# Altium PCB my.PcbDoc (part 2 of 3)
Units mm, origin at the board's own origin, x right, y up, seen from the top; angles counter-clockwise.
Board outline 100 x 100 mm, 4 copper layers (Top Layer, Internal Plane 1, Internal Plane 2, Bottom Layer); 136 components, 166 nets, 575 pads, 210 vias.
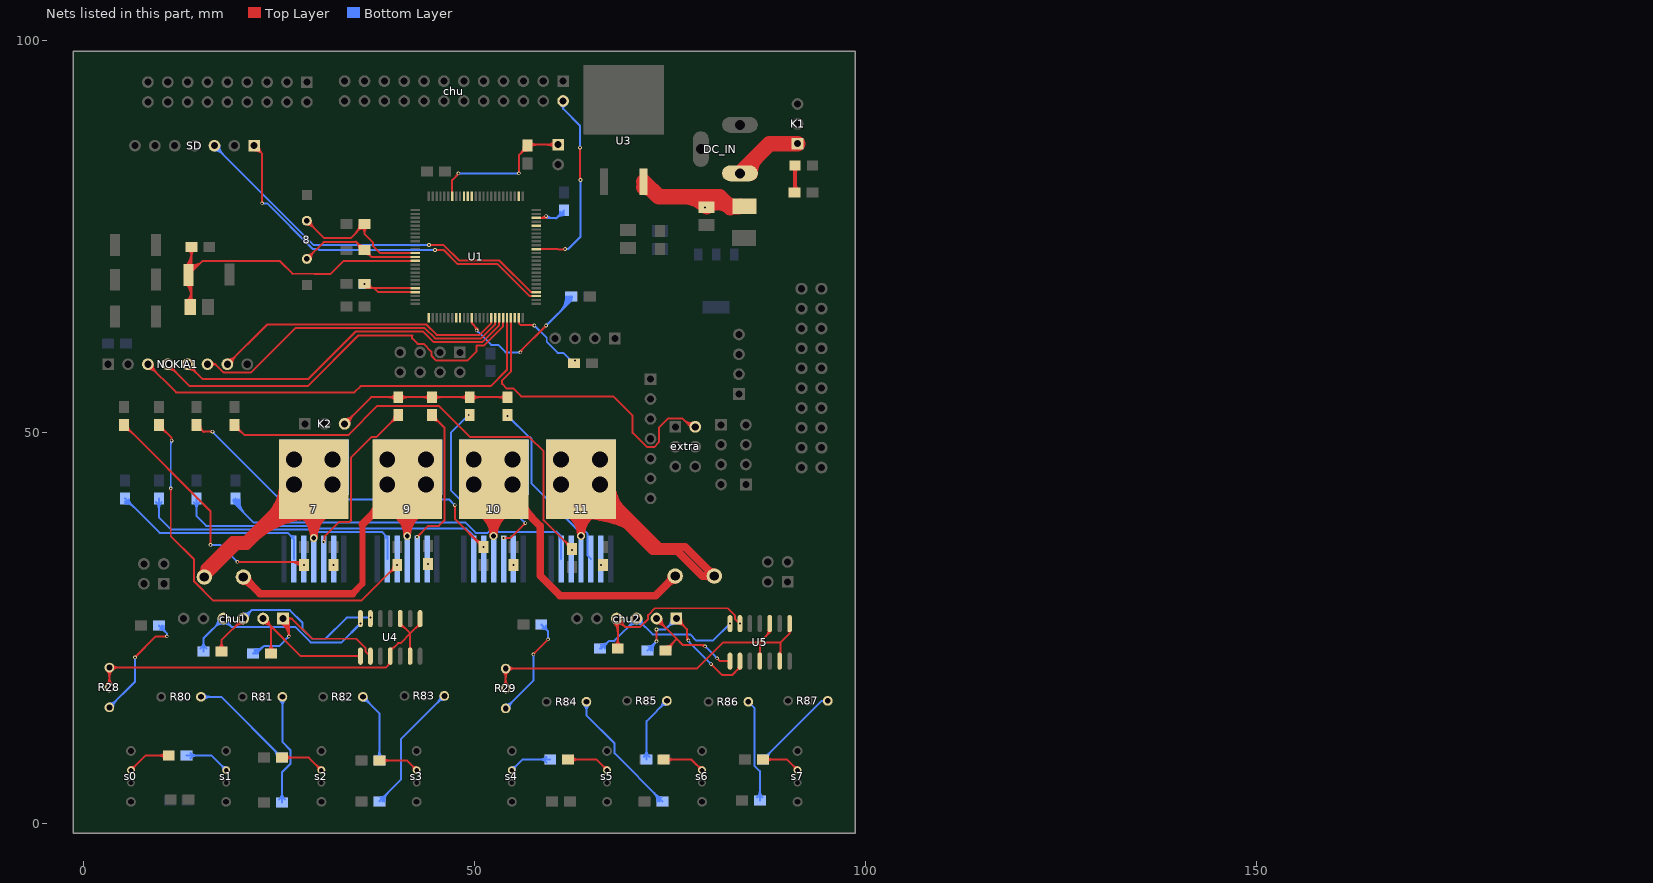
[diagram p4: the nets of this part, all layers, seen from the top]

## Via types
v1: diameter 0.457, hole 0.254, Top Layer to Bottom Layer, 170 vias
v2: diameter 3.5, hole 3, Top Layer to Bottom Layer, 12 vias
v3: diameter 0.8, hole 0.6, Top Layer to Bottom Layer, 7 vias
v4: diameter 1.27, hole 0.711, Top Layer to Bottom Layer, 6 vias
v5: diameter 1, hole 0.6, Top Layer to Bottom Layer, 5 vias
v6: diameter 2.5, hole 2.5, Top Layer to Bottom Layer, tented bottom, 4 vias
v7: diameter 0.7, hole 0.5, Top Layer to Bottom Layer, 2 vias
v8: diameter 0.8, hole 0.4, Top Layer to Bottom Layer, 2 vias
v9: diameter 0.7, hole 0.4, Top Layer to Bottom Layer, 1 vias
v10: diameter 1.2, hole 0.8, Top Layer to Bottom Layer, 1 vias

## Nets (pads, with @x,y where several pads share a name; then routed paths per layer and width w, separated by ;. In a path a pad name is that pad's centre, name@x,y a point inside that pad or via, vN(x,y) a via of type N, cw(c..) or ccw(c..) an arc to the next point about the centre after c; other vN are vias at no path point) (continued)
L0: c100.1 chu1.1 U4.2 | length 35.3
  Top Layer w0.254: chu1.1@25.213,25.624 cw(c24.123,23.752) v1@26.289,23.752 ; chu1.1@25.341,25.843 cw(c24.381,24.194) 26.289,24.194 ; chu1.1@25.469,26.063 cw(c24.638,24.636) 26.289,24.636 ; chu1.1@25.527,26.162 26.654,26.162 ; chu1.1@25.597,26.282 cw(c24.896,25.078) 26.289,25.078 ; chu1.1@25.725,26.502 cw(c25.153,25.52) 26.289,25.52 ; v1@26.217,23.948 ccw(c26.044,24.121) 26.289,24.121 ccw(c26.534,24.121) v1@26.361,23.948 ; v1(26.289,23.876) 26.289,25.4 ; U4.2@36.703,21.349 36.06,21.992 36.06,22.409 34.892,23.577 29.239,23.577 26.654,26.162 ; 26.654,26.162 cw(c26.654,26.869) 26.055,26.493 ccw(c26.654,26.869) 26.654,26.162 ; 26.654,26.162 ccw(c26.654,25.455) 26.055,25.831 cw(c26.654,25.455) 26.654,26.162
  Bottom Layer w0.254: c100.1@21.717,21.719 22.144,21.719 23.106,22.681 ; c100.1@21.863,21.972 ccw(c21.942,23.059) 22.713,22.288 ; c100.1@21.881,22.225 ccw(c21.996,23.79) 23.106,22.681 ; c100.1@22.352,21.719 cw(c22.855,21.719) 22.499,22.074 ; v1@26.187,23.876 cw(c25.942,23.876) 26.116,23.703 cw(c26.289,23.529) v1@26.289,23.774 ; v1(26.289,23.876) 25.094,22.681 23.106,22.681
L1: C101.1 chu1.2 U4.1 | length 28.4
  Top Layer w0.254: chu1.2@22.987,25.539 cw(c22.987,24.035) 24.051,25.098 cw(c25.114,26.162) chu1.2@23.61,26.162 ; chu1.2@22.987,25.793 cw(c22.987,24.902) 23.617,25.532 cw(c24.247,26.162) chu1.2@23.356,26.162 ; chu1.2@22.987,26.162 24.003,25.146 ; chu1.2@22.999,25.793 cw(c23.025,24.997) 23.589,25.56 cw(c24.152,26.124) chu1.2@23.356,26.15 ; chu1.2@23.007,25.539 cw(c23.052,24.195) 24.003,25.146 ; chu1.2@23.61,26.142 ccw(c24.954,26.097) 24.003,25.146 ; C101.1@23.644,22.078 ccw(c22.777,22.945) 24.003,22.945 ccw(c25.229,22.945) C101.1@24.362,22.078 ; C101.1@24.003,21.719 24.003,25.146 ; U4.1@35.433,21.349 27.8,21.349 24.003,25.146 ; 35.015,21.349 cw(c35.015,20.931) 35.311,21.227 ccw(c35.015,20.931) 35.015,21.349 ; 35.015,21.349 ccw(c35.015,21.767) 35.311,21.471 cw(c35.015,21.767) 35.015,21.349
L2: C102.1 chu1.3 U4.13 | length 38.5
  Top Layer w0.254: C102.1@17.294,22.332 ccw(c16.427,23.199) 17.653,23.199 ccw(c18.879,23.199) C102.1@18.012,22.332 ; C102.1@17.653,21.973 17.653,23.368 chu1.3@20.447,26.162 ; chu1.3@19.824,26.162 cw(c18.32,26.162) 19.383,25.098 cw(c20.447,24.035) chu1.3@20.447,25.539 ; chu1.3@20.078,26.162 cw(c19.187,26.162) 19.817,25.532 cw(c20.447,24.902) chu1.3@20.447,25.793
  Bottom Layer w0.254: chu1.3@20.447,26.162 21.524,27.239 26.412,27.239 28.022,25.629 28.022,24.794 29.239,23.577 30.959,23.577 33.671,26.289 36.449,26.289 ; v1@36.631,26.217 ccw(c36.458,26.044) 36.458,26.289 ccw(c36.458,26.534) v1@36.631,26.361 ; 21.077,26.792 cw(c20.447,27.422) 20.447,26.531 ccw(c20.447,27.422) 21.077,26.792 ; 21.077,26.792 ccw(c21.707,26.162) 20.816,26.162 cw(c21.707,26.162) 21.077,26.792 ; 21.511,27.226 cw(c20.447,28.289) 20.447,26.785 ccw(c20.447,28.289) 21.511,27.226 ; 21.511,27.226 ccw(c22.574,26.162) 21.07,26.162 cw(c22.574,26.162) 21.511,27.226
  other v1: 36.703,26.289
L3: C103.1 chu1.4 U4.14 | length 39
  Bottom Layer w0.254: C103.1@15.008,22.333 ccw(c14.141,23.201) 15.367,23.201 ccw(c16.593,23.201) C103.1@15.726,22.333 ; C103.1@15.367,21.974 15.367,23.622 chu1.4@17.907,26.162 18.984,25.085 27.089,25.085 29.051,23.123 33.029,23.123 v1(35.433,25.527) ; chu1.4@17.284,26.162 cw(c15.78,26.162) 16.843,25.098 cw(c17.907,24.035) chu1.4@17.907,25.539 ; chu1.4@17.538,26.162 cw(c16.647,26.162) 17.277,25.532 cw(c17.907,24.902) chu1.4@17.907,25.793 ; chu1.4@17.907,25.539 cw(c17.907,24.035) 18.971,25.098 ; chu1.4@17.907,25.539 cw(c17.907,24.035) 18.971,25.098 ; chu1.4@17.907,25.793 cw(c17.907,24.902) 18.537,25.532 ; chu1.4@17.907,25.793 cw(c17.907,24.902) 18.537,25.532 ; 18.537,25.532 cw(c19.167,26.162) 18.276,26.162 ccw(c19.167,26.162) 18.537,25.532 ; 18.971,25.098 cw(c20.034,26.162) 18.53,26.162 ccw(c20.034,26.162) 18.971,25.098 ; 35.26,25.354 cw(c35.433,25.18) 35.433,25.425 ccw(c35.433,25.18) 35.26,25.354 ; 35.26,25.354 ccw(c35.086,25.527) 35.331,25.527 cw(c35.086,25.527) 35.26,25.354
L4: C104.1 chu2.1 U5.2 | length 40
  Top Layer w0.254: v1@73.206,23.313 ccw(c73.028,23.49) 73.279,23.49 ; v1@73.207,24.693 cw(c73.034,24.52) 73.279,24.52 cw(c73.524,24.52) v1@73.351,24.693 ; v1(73.277,23.241) 73.279,23.243 v1(73.279,24.765) ; 73.279,23.482 ccw(c73.519,23.482) v1@73.349,23.313 ; chu2.1@75.819,26.162 77.171,24.81 77.171,23.54 v1(77.343,23.368) ; v1(80.264,20.32) 81.661,18.923 82.931,18.923 83.947,19.939 U5.2@83.947,20.714 ; chu2.1@76.449,25.532 cw(c77.079,26.162) 76.188,26.162 ccw(c77.079,26.162) chu2.1@76.449,25.532 ; chu2.1@76.449,25.532 ccw(c75.819,24.902) 75.819,25.793 cw(c75.819,24.902) chu2.1@76.449,25.532 ; 76.883,25.098 cw(c77.946,26.162) 76.442,26.162 ccw(c77.946,26.162) 76.883,25.098 ; 76.883,25.098 ccw(c75.819,24.035) 75.819,25.539 cw(c75.819,24.035) 76.883,25.098 ; 80.437,20.147 cw(c80.611,20.32) 80.366,20.32 ccw(c80.611,20.32) 80.437,20.147 ; 80.437,20.147 ccw(c80.264,19.973) 80.264,20.218 cw(c80.264,19.973) 80.437,20.147 ; 77.171,24.029 ccw(c78.004,24.029) 77.415,23.44 cw(c78.004,24.029) 77.171,24.029 ; 83.609,19.601 cw(c83.947,19.263) 83.947,19.741 ccw(c83.947,19.263) 83.609,19.601 ; 83.669,19.661 ccw(c83.417,19.914) 83.774,19.914 cw(c83.417,19.914) 83.669,19.661
  Bottom Layer w0.254: C104.1@72.136,22.1 v1(73.277,23.241) ; C104.1@72.263,22.608 ccw(c72.263,23.527) 72.913,22.877 ; C104.1@72.517,22.1 cw(c73.437,22.1) 72.786,22.75 ; C104.1@72.771,22.1 cw(c74.304,22.1) v1@73.22,23.184 ; v1@73.176,23.241 cw(c72.93,23.241) 73.104,23.068 cw(c73.277,22.894) v1@73.277,23.139 ; v1(73.279,24.765) 74.422,24.765 chu2.1@75.819,26.162 ; v1@73.351,24.693 cw(c73.524,24.52) 73.524,24.765 cw(c73.524,25.01) v1@73.351,24.837 ; chu2.1@75.196,26.162 cw(c73.692,26.162) 74.755,25.098 cw(c75.819,24.035) chu2.1@75.819,25.539 ; chu2.1@75.45,26.162 cw(c74.559,26.162) 75.189,25.532 cw(c75.819,24.902) chu2.1@75.819,25.793 ; v1(77.343,23.368) 77.343,23.241 v1(80.264,20.32) v1@80.264,20.447 ; 80.091,20.493 cw(c79.917,20.32) 80.162,20.32 ccw(c79.917,20.32) 80.091,20.493 ; 80.091,20.493 ccw(c80.264,20.667) 80.264,20.422 cw(c80.264,20.667) 80.091,20.493 ; v1@77.445,23.368 ccw(c77.996,23.368) 77.606,22.978 cw(c77.996,23.368) v1@77.445,23.368
L5: C105.1 chu2.2 U5.1 | length 28.1
  Top Layer w0.254: chu2.2@73.279,26.162 75.755,23.685 ; C105.1@74.422,22.101 75.755,23.435 75.755,23.685 ; C105.1@74.549,22.609 ccw(c74.549,23.529) 75.199,22.879 ; C105.1@74.803,22.101 cw(c75.723,22.101) 75.072,22.752 ; C105.1@75.057,22.101 cw(c76.59,22.101) 75.506,23.185 ; v1(79.502,22.608) 79.329,22.781 76.66,22.781 75.755,23.685 ; v1(81.026,21.082) 81.394,20.714 U5.1@82.677,20.714 ; 73.909,25.532 cw(c74.539,26.162) 73.648,26.162 ccw(c74.539,26.162) 73.909,25.532 ; 73.909,25.532 ccw(c73.279,24.902) 73.279,25.793 cw(c73.279,24.902) 73.909,25.532 ; 74.343,25.098 cw(c75.406,26.162) 73.902,26.162 ccw(c75.406,26.162) 74.343,25.098 ; 74.343,25.098 ccw(c73.279,24.035) 73.279,25.539 cw(c73.279,24.035) 74.343,25.098 ; 82.259,20.714 cw(c82.259,20.296) 82.555,20.592 ccw(c82.259,20.296) 82.259,20.714 ; 82.259,20.714 ccw(c82.259,21.132) 82.555,20.836 cw(c82.259,21.132) 82.259,20.714 ; 78.84,22.781 cw(c78.84,21.946) 79.43,22.536 ccw(c78.84,21.946) 78.84,22.781
  Bottom Layer w0.254: v1(79.502,22.608) v1(79.502,22.608) 79.502,22.606 v1(81.026,21.082) ; 80.853,21.255 cw(c80.679,21.082) 80.924,21.082 ccw(c80.679,21.082) 80.853,21.255 ; 80.853,21.255 ccw(c81.026,21.429) 81.026,21.184 cw(c81.026,21.429) 80.853,21.255 ; v1@79.502,22.506 cw(c79.502,22.266) 79.672,22.436 ccw(c79.502,22.266) v1@79.502,22.506 ; v1@79.604,22.608 ccw(c79.854,22.608) 79.677,22.431 cw(c79.854,22.608) v1@79.604,22.608
L6: C106.1 chu2.3 U5.14 | length 35
  Bottom Layer w0.254: C106.1@66.04,22.354 66.275,22.354 67.237,23.316 67.893,23.316 chu2.3@70.739,26.162 72.771,24.13 77.581,24.13 78.388,23.323 80.486,23.323 v1(82.677,25.514) ; C106.1@66.167,22.608 ccw(c66.167,23.482) C106.1@66.785,22.864 ; C106.1@66.167,22.862 ccw(c66.167,24.349) 67.219,23.297 ; C106.1@66.675,22.354 cw(c67.641,22.354) 66.958,23.036 ; chu2.3@70.116,26.162 cw(c68.612,26.162) 69.675,25.098 cw(c70.739,24.035) chu2.3@70.739,25.539 ; chu2.3@70.37,26.162 cw(c69.479,26.162) 70.109,25.532 cw(c70.739,24.902) chu2.3@70.739,25.793 ; chu2.3@70.739,25.539 cw(c70.739,24.035) 71.803,25.098 ; chu2.3@70.739,25.539 cw(c70.739,24.035) 71.803,25.098 ; chu2.3@70.739,25.793 cw(c70.739,24.902) 71.369,25.532 ; chu2.3@70.739,25.793 cw(c70.739,24.902) 71.369,25.532 ; 71.369,25.532 cw(c71.999,26.162) 71.108,26.162 ccw(c71.999,26.162) 71.369,25.532 ; 71.803,25.098 cw(c72.866,26.162) 71.362,26.162 ccw(c72.866,26.162) 71.803,25.098 ; 82.504,25.341 cw(c82.677,25.167) 82.677,25.412 ccw(c82.677,25.167) 82.504,25.341 ; 82.504,25.341 ccw(c82.33,25.514) 82.575,25.514 cw(c82.33,25.514) 82.504,25.341
L7: C107.1 chu2.4 U5.13 | length 35.8
  Top Layer w0.254: chu2.4@67.758,25.721 cw(c66.388,24.351) 68.326,24.351 ; chu2.4@67.938,25.901 cw(c67.002,24.965) 68.326,24.965 cw(c69.396,24.965) chu2.4@68.64,25.721 ; C107.1@67.967,22.714 ccw(c67.1,23.582) 68.326,23.582 ccw(c69.552,23.582) C107.1@68.685,22.714 ; chu2.4@68.199,26.162 chu2.4@68.326,26.035 ; C107.1@68.326,22.355 chu2.4@68.326,26.035 ; v1(83.947,25.514) 83.304,26.157 83.304,26.574 82.401,27.477 73.071,27.477 72.202,26.608 72.202,26.102 71.185,25.085 69.276,25.085 chu2.4@68.326,26.035 ; 68.829,25.532 cw(c69.459,26.162) 68.568,26.162 ccw(c69.459,26.162) 68.829,25.532 ; 68.829,25.532 ccw(c68.199,24.902) 68.199,25.793 cw(c68.199,24.902) 68.829,25.532 ; 69.263,25.098 cw(c70.326,26.162) 68.822,26.162 ccw(c70.326,26.162) 69.263,25.098 ; 69.263,25.098 ccw(c68.199,24.035) 68.199,25.539 cw(c68.199,24.035) 69.263,25.098 ; U5.13@83.774,25.687 cw(c83.6,25.514) 83.845,25.514 ccw(c83.6,25.514) U5.13@83.774,25.687 ; U5.13@83.774,25.687 ccw(c83.947,25.861) 83.947,25.616 cw(c83.947,25.861) U5.13@83.774,25.687
MISO0: SD.1 U1.53 | length 52.2
  Top Layer w0.254: SD.1@21.844,86.614 22.86,85.598 ; SD.1@21.856,86.245 cw(c21.882,85.449) 22.446,86.012 cw(c23.009,86.576) SD.1@22.213,86.602 ; SD.1@21.864,85.991 cw(c21.909,84.647) 22.86,85.598 ; SD.1@22.467,86.594 ccw(c23.811,86.549) 22.86,85.598 ; v1@22.788,79.32 ccw(c22.615,79.493) 22.86,79.493 ccw(c23.105,79.493) v1@22.932,79.32 ; v1(22.86,79.248) 22.86,85.598 ; v1(44.958,73.279) 46.07,73.279 47.867,71.482 52.959,71.482 57.051,67.39 U1.53@57.915,67.39 ; v1@45.03,73.207 cw(c45.203,73.034) 45.203,73.279 cw(c45.203,73.524) v1@45.03,73.351
  Bottom Layer w0.254: 23.114,79.248 23.488,79.248 29.33,73.406 30.026,73.406 30.153,73.279 v1(44.958,73.279) ; v1@44.886,73.207 ccw(c44.713,73.034) 44.713,73.279 ccw(c44.713,73.524) v1@44.886,73.351
MOSI0: SD.3 U1.54 | length 53.2
  Top Layer w0.254: v1@44.268,73.842 cw(c44.441,73.669) 44.441,73.914 cw(c44.441,74.159) v1@44.268,73.986 ; 44.45,73.914 46.077,73.914 48.055,71.936 53.157,71.936 57.18,67.913 57.892,67.913 U1.54@57.915,67.89
  Bottom Layer w0.254: SD.3@16.764,85.991 cw(c16.764,84.487) 17.828,85.55 cw(c18.891,86.614) SD.3@17.387,86.614 ; SD.3@16.764,86.245 cw(c16.764,85.354) 17.394,85.984 cw(c18.024,86.614) SD.3@17.133,86.614 ; SD.3@16.764,86.614 29.464,73.914 v1(44.196,73.914) ; v1@44.124,73.842 ccw(c43.951,73.669) 43.951,73.914 ccw(c43.951,74.159) v1@44.124,73.986
NCLK: NOKIA1.7 U1.42 | length 41.5
  Top Layer w0.254: NOKIA1.7@18.415,58.674 23.495,63.754 43.839,63.754 45.156,62.436 50.674,62.436 52.142,63.905 52.142,64.617 U1.42@52.165,64.64 ; NOKIA1.7@18.415,59.043 ccw(c18.415,59.934) 19.045,59.304 ccw(c19.675,58.674) NOKIA1.7@18.784,58.674 ; NOKIA1.7@18.415,59.297 ccw(c18.415,60.801) 19.479,59.738 ccw(c20.542,58.674) NOKIA1.7@19.038,58.674
NCS: NOKIA1.3 U1.46 | length 59
  Top Layer w0.254: NOKIA1.3@8.255,58.051 cw(c8.255,56.547) 9.319,57.61 cw(c10.382,58.674) NOKIA1.3@8.878,58.674 ; NOKIA1.3@8.255,58.305 cw(c8.255,57.414) 8.885,58.044 cw(c9.515,58.674) NOKIA1.3@8.624,58.674 ; NOKIA1.3@8.255,58.674 11.856,55.073 34.642,55.073 35.449,55.88 52.07,55.88 54.165,57.975 U1.46@54.165,64.64
NDC: NOKIA1.5 U1.44 | length 49.3
  Top Layer w0.254: NOKIA1.5@13.335,58.051 cw(c13.335,56.547) 14.399,57.61 cw(c15.462,58.674) NOKIA1.5@13.958,58.674 ; NOKIA1.5@13.335,58.305 cw(c13.335,57.414) 13.965,58.044 cw(c14.595,58.674) NOKIA1.5@13.704,58.674 ; NOKIA1.5@13.335,58.674 15.24,56.769 28.721,56.769 34.798,62.846 43.434,62.846 44.752,61.528 51.05,61.528 53.165,63.643 U1.44@53.165,64.64
NDN: NOKIA1.6 U1.43 | length 42.9
  Top Layer w0.254: NOKIA1.6@15.875,58.674 16.892,58.674 ; NOKIA1.6@16.43,58.391 cw(c16.892,58.156) 16.892,58.674 ; NOKIA1.6@16.43,58.957 ccw(c16.892,59.192) 16.892,58.674 ; U1.43@52.665,64.64 52.642,64.617 52.642,63.763 50.862,61.982 44.968,61.982 43.651,63.3 27.104,63.3 21.401,57.597 17.969,57.597 16.892,58.674
NET0: R28.2 R28.3 U4.4 U4.6 U4.8 U4.10 | length 69.2
  Top Layer w0.254: R28.2@3.327,17.348 R28.3@3.327,19.888 38.684,19.888 39.243,20.447 U4.4@39.243,21.349 39.243,22.02 40.253,23.03 40.556,23.03 41.783,24.257 ; U4.10@40.513,26.403 U4.10@40.513,26.149 40.513,25.527 41.783,24.257 ; U4.6@41.783,21.603 41.783,24.257 ; U4.8@43.053,26.403 U4.8@43.053,26.149 43.053,25.527 41.783,24.257 ; 3.327,18.55 cw(c2.125,18.55) 2.975,17.7 ccw(c2.125,18.55) 3.327,18.55 ; 3.327,18.55 ccw(c4.53,18.55) 3.68,17.7 cw(c4.53,18.55) 3.327,18.55 ; 3.327,18.686 cw(c4.53,18.686) R28.3@3.68,19.536 ; 3.327,18.686 ccw(c2.125,18.686) 2.975,19.536 cw(c2.125,18.686) 3.327,18.686 ; 3.327,18.686 cw(c4.53,18.686) R28.3@3.68,19.536 ; R28.3@3.68,19.536 cw(c4.53,18.686) 4.53,19.888 ; R28.3@3.68,19.536 cw(c4.53,18.686) 4.53,19.888 ; 4.53,19.888 cw(c4.53,21.09) 3.68,20.24 ccw(c4.53,21.09) 4.53,19.888 ; 41.783,22.567 cw(c41.365,22.567) 41.661,22.271 ccw(c41.365,22.567) 41.783,22.567 ; 41.783,22.567 ccw(c42.201,22.567) 41.905,22.271 cw(c42.201,22.567) 41.783,22.567 ; 38.876,20.08 ccw(c38.406,20.549) 39.07,20.549 cw(c38.406,20.549) 38.876,20.08 ; U4.4@39.243,22.322 ccw(c39.243,23.052) 39.759,22.536 cw(c39.243,23.052) U4.4@39.243,22.322 ; U4.10@40.513,25.176 cw(c40.513,24.329) 41.112,24.928 ccw(c40.513,24.329) U4.10@40.513,25.176 ; 42.454,24.928 cw(c43.053,24.329) 43.053,25.176 ccw(c43.053,24.329) 42.454,24.928
NET1: R29.2 R29.3 U5.4 U5.6 U5.8 U5.10 | length 68.8
  Top Layer w0.254: R29.2@54,17.221 R29.3@54,19.761 78.435,19.761 81.788,23.114 86.487,23.114 ; U5.4@86.487,20.714 86.487,23.114 ; U5.10@87.757,25.514 87.757,24.384 ; U5.6@89.027,20.714 89.154,20.841 89.154,23.114 ; U5.8@90.297,25.514 90.297,24.257 89.154,23.114 ; 54,18.423 cw(c52.798,18.423) 53.648,17.573 ccw(c52.798,18.423) 54,18.423 ; 54,18.423 ccw(c55.203,18.423) 54.353,17.573 cw(c55.203,18.423) 54,18.423 ; 54,18.559 cw(c55.203,18.559) R29.3@54.353,19.409 ; 54,18.559 ccw(c52.798,18.559) 53.648,19.409 cw(c52.798,18.559) 54,18.559 ; 54,18.559 cw(c55.203,18.559) R29.3@54.353,19.409 ; R29.3@54.353,19.409 cw(c55.203,18.559) 55.203,19.761 ; R29.3@54.353,19.409 cw(c55.203,18.559) 55.203,19.761 ; 55.203,19.761 cw(c55.203,20.963) 54.353,20.113 ccw(c55.203,20.963) 55.203,19.761 ; 86.487,21.932 cw(c86.069,21.932) 86.365,21.636 ccw(c86.069,21.932) 86.487,21.932 ; 86.487,21.932 ccw(c86.905,21.932) 86.609,21.636 cw(c86.905,21.932) 86.487,21.932 ; 86.487,23.114 89.154,23.114 ; 86.487,23.114 87.757,24.384 ; 87.757,24.384 cw(c87.985,24.384) 87.855,24.572 ccw(c87.985,24.384) 87.757,24.384 ; 87.757,24.384 ccw(c87.529,24.384) 87.659,24.572 cw(c87.529,24.384) 87.757,24.384 ; 90.297,24.296 cw(c90.715,24.296) 90.419,24.592 ccw(c90.715,24.296) 90.297,24.296 ; 90.297,24.296 ccw(c89.879,24.296) 90.175,24.592 cw(c89.879,24.296) 90.297,24.296 ; 87.228,23.855 ccw(c86.37,24.714) 87.584,24.714 cw(c86.37,24.714) 87.228,23.855 ; 87.662,24.289 ccw(c87.237,24.714) 87.838,24.714 cw(c87.237,24.714) 87.662,24.289 ; U5.6@88.905,21.636 ccw(c88.303,22.238) 89.154,22.238 cw(c88.303,22.238) U5.6@88.905,21.636
Net7_2: 7.2 R2.1
  other v1: 32.006,33.033
Net7_3: 7.3 R4.1 | length 24.6
  Top Layer w0.254: v1@30.662,36.026 ccw(c30.182,36.506) 30.861,36.506 ; v1(30.734,35.954) 30.734,36.068 30.747,36.081 30.861,36.081 30.861,36.703 32.693,38.535 34.044,38.535 34.236,38.727 34.236,46.763 36.822,49.349 37.441,49.349 R4.1@40.261,52.168 ; 39.177,51.084 cw(c40.261,50) R4.1@40.261,51.533 ; 39.483,51.391 ccw(c38.833,52.041) R4.1@39.753,52.041 ; 39.61,51.518 cw(c40.261,50.868) R4.1@40.261,51.787
Net7_5: 7.5 C10.2 R6.1 | length 40.8
  Top Layer w0.254: R6.1@5.209,50.292 cw(c5.209,48.759) 6.293,49.843 ; R6.1@5.209,50.546 cw(c5.209,49.626) 5.859,50.277 ; R6.1@5.209,50.927 16.256,39.88 v1(16.256,35.573) v1@16.256,35.56 ; R6.1@5.717,50.8 ccw(c6.636,50.8) 5.986,50.15 ; v1@16.184,35.645 ccw(c16.011,35.818) 16.256,35.818 ccw(c16.501,35.818) v1@16.328,35.645 ; v1(19.685,33.414) 27.798,33.414 C10.2@28.192,33.02 ; v1@19.757,33.342 cw(c19.93,33.169) 19.93,33.414 cw(c19.93,33.659) v1@19.757,33.486 ; 26.321,33.414 cw(c26.321,31.276) C10.2@27.833,32.788 ; 26.935,33.414 cw(c26.935,31.889) C10.2@28.013,32.967 ; 27.548,33.414 cw(c27.548,32.502) C10.2@28.192,33.147 ; C10.2@27.611,33.414 ccw(c27.611,33.729) C10.2@27.833,33.506
  Bottom Layer w0.254: v1(16.256,35.573) 17.513,35.573 v1@19.685,33.401 ; v1@16.328,35.501 cw(c16.501,35.328) 16.501,35.573 cw(c16.501,35.818) v1@16.328,35.645 ; 19.489,33.597 ccw(c19.685,33.792) v1@19.685,33.516
  other v1: 28.192,33.033
Net7_6: 7.6 R5.1 | length 29.8
  Bottom Layer w0.254: R5.1@5.336,40.894 cw(c5.336,39.361) 6.42,40.445 ; R5.1@5.336,41.148 cw(c5.336,40.228) 5.986,40.879 ; R5.1@5.336,41.529 9.756,37.109 26.139,37.109 26.924,36.324 7.6@26.924,33.782 ; R5.1@5.844,41.402 ccw(c6.763,41.402) 6.113,40.752 ; 26.36,36.889 ccw(c26.924,37.453) 7.6@26.924,36.655 ; 7.6@26.619,36.629 cw(c26.422,36.432) 7.6@26.701,36.432
Net9_2: 9.2 R7.1
  other v1: 44.069,33.147
Net9_3: 9.3 R8.1 | length 21.6
  Top Layer w0.254: v1(42.672,36.589) 44.056,37.973 45.466,37.973 45.466,38.019 46.174,38.727 46.174,50.573 R8.1@44.579,52.168 ; v1@42.672,36.691 ccw(c42.672,36.936) 42.845,36.762 ccw(c43.019,36.589) v1@42.774,36.589 ; R8.1@44.579,51.533 cw(c44.579,50) 45.663,51.084 ; R8.1@44.579,51.787 cw(c44.579,50.868) 45.229,51.518 ; R8.1@45.087,52.041 ccw(c46.006,52.041) 45.356,51.391
Net9_5: 9.5 C12.2 R10.1 | length 57.8
  Top Layer w0.254: R10.1@9.654,50.292 cw(c9.654,48.759) 10.738,49.843 ; R10.1@9.654,50.546 cw(c9.654,49.626) 10.304,50.277 ; R10.1@9.654,50.927 11.303,49.278 v1(11.303,48.908) ; R10.1@10.162,50.8 ccw(c11.081,50.8) 10.431,50.15 ; v1@11.104,42.74 cw(c10.931,42.567) 11.176,42.567 cw(c11.421,42.567) v1@11.248,42.74 ; v1@11.176,42.799 11.176,36.703 14.151,33.728 14.151,30.925 16.628,28.448 35.558,28.448 C12.2@40.13,33.02 ; 39.046,31.936 cw(c40.13,30.852) C12.2@40.13,32.385 ; 39.353,32.243 ccw(c38.703,32.893) C12.2@39.622,32.893 ; 39.48,32.37 cw(c40.13,31.719) C12.2@40.13,32.639 ; C12.2@39.956,32.845 cw(c40.132,32.669) C12.2@40.132,32.918 ; C12.2@39.96,32.849 ccw(c39.789,33.02) C12.2@40.03,33.02
  Bottom Layer w0.254: v1@11.104,42.884 ccw(c10.931,43.057) 11.176,43.057 ccw(c11.421,43.057) v1@11.248,42.884 ; v1(11.176,42.812) 11.176,48.768 v1@11.303,48.895 ; 11.176,48.356 cw(c11.855,48.356) v1@11.375,48.836
  other v1: 40.132,33.02
Net9_6: 9.6 R9.1 | length 38.1
  Bottom Layer w0.254: R9.1@9.294,41.043 cw(c8.427,40.176) 9.654,40.176 cw(c10.88,40.176) R9.1@10.013,41.043 ; R9.1@9.654,41.529 9.654,39.114 11.205,37.563 29.52,37.563 29.872,37.211 38.227,37.211 38.862,36.576 9.6@38.862,33.782 ; 38.379,37.059 cw(c37.753,36.432) 9.6@38.639,36.432
Net10_2: 10.2 R11.1
  other v1: 54.991,33.02
Net10_3: 10.3 R12.1 | length 26.7
  Top Layer w0.254: v1(53.721,36.462) 54.623,36.462 v1@56.515,38.354 ; v1@53.793,36.39 cw(c53.966,36.217) 53.966,36.462 cw(c53.966,36.707) v1@53.793,36.534 ; 56.332,38.171 ccw(c56.137,38.367) v1@56.413,38.367
  Bottom Layer w0.254: 49.093,52.014 ccw(c48.898,52.21) v1@49.174,52.21 ; v1@49.34,52.197 49.276,52.197 46.985,49.906 46.985,42.545 48.509,41.021 53.861,41.021 v1(56.515,38.367) ; v1@56.413,38.367 ccw(c56.168,38.367) 56.342,38.54 ccw(c56.515,38.714) v1@56.515,38.469
  other v1: 49.276,52.21
Net10_5: 10.5 C15.2 R14.1 | length 51
  Top Layer w0.254: R14.1@14.48,50.927 15.356,50.051 v1(16.51,50.051) ; R14.1@14.508,50.548 cw(c14.583,49.896) R14.1@15.047,50.36 ; R14.1@14.537,50.295 cw(c14.659,49.228) 15.419,49.988 ; R14.1@14.988,50.8 ccw(c15.907,50.8) 15.257,50.15 ; v1@16.438,49.979 ccw(c16.265,49.806) 16.265,50.051 ccw(c16.265,50.296) v1@16.438,50.123 ; v1@47.426,40.581 cw(c47.253,40.408) 47.498,40.408 cw(c47.743,40.408) v1@47.57,40.581 ; v1@47.498,40.64 47.498,38.908 51.1,35.306 v1(51.181,35.306) v1(51.181,35.306) ; 49.957,36.449 ccw(c51.183,37.675) C15.2@51.183,35.941 ; 50.39,36.015 ccw(c51.183,36.807) C15.2@51.183,35.687 ; 50.464,35.942 cw(c49.955,35.433) C15.2@50.675,35.433 ; C15.2@50.869,35.537 ccw(c51.181,35.85) C15.2@51.181,35.408
  Bottom Layer w0.254: v1@16.51,50.038 24.743,41.805 24.743,41.8 25.141,41.402 46.749,41.402 v1(47.498,40.653) ; v1@16.612,50.051 ccw(c16.888,50.051) 16.693,49.855 ; v1@47.396,40.653 ccw(c47.151,40.653) 47.325,40.826 ccw(c47.498,41) v1@47.498,40.755
Net10_6: 10.6 R13.1 | length 42.2
  Bottom Layer w0.254: R13.1@14.117,41.043 cw(c13.25,40.176) 14.476,40.176 cw(c15.703,40.176) R13.1@14.836,41.043 ; R13.1@14.476,41.529 14.476,39.245 15.704,38.017 29.747,38.017 30.099,37.665 48.968,37.665 10.6@49.911,36.722 ; 49.325,37.308 cw(c48.45,36.432) 10.6@49.688,36.432 ; 49.759,36.874 cw(c49.317,36.432) 10.6@49.942,36.432
Net11_2: 11.2 R15.1
  other v1: 66.167,33.02
Net11_3: 11.3 R16.1 | length 23.5
  Bottom Layer w0.254: v1@54.229,52.07 56.925,49.374 57.082,49.374 57.274,49.183 57.274,43.432 63.176,37.53 63.97,37.53 64.454,37.046 64.454,34.225 11.3@64.897,33.782 ; v1@54.331,52.083 ccw(c54.607,52.083) 54.412,51.887
  other v1: 54.229,52.083
Net11_5: 11.5 C20.2 R18.1 | length 63.7
  Top Layer w0.254: R18.1@19.306,50.292 cw(c19.306,48.759) 20.39,49.843 ; R18.1@19.306,50.546 cw(c19.306,49.626) 19.956,50.277 ; R18.1@19.306,50.927 20.576,49.657 33.909,49.657 37.592,53.34 45.458,53.34 49.449,49.349 57.031,49.349 58.855,47.525 58.855,38.727 62.486,35.096 C20.2@62.486,35.052 ; R18.1@19.814,50.8 ccw(c20.733,50.8) 20.083,50.15 ; 61.477,36.105 ccw(c62.486,37.114) C20.2@62.486,35.687 ; 61.677,35.904 cw(c60.952,35.179) C20.2@61.978,35.179 ; C20.2@61.91,35.671 ccw(c62.486,36.247) C20.2@62.486,35.433 ; C20.2@62.189,35.393 cw(c61.721,34.925) C20.2@62.382,34.925
  other v1: 62.484,34.925
Net11_6: 11.6 R17.1 | length 54.5
  Bottom Layer w0.254: R17.1@19.175,41.402 ccw(c20.091,41.402) 19.444,40.754 ; R17.1@19.429,41.402 ccw(c20.958,41.402) 19.877,40.321 ; R17.1@19.429,41.529 19.429,40.769 21.727,38.471 48.804,38.471 50.166,37.109 51.687,37.109 52.108,37.53 52.794,37.53 53.113,37.211 60.579,37.211 61.087,36.703 11.6@61.087,33.782 ; R17.1@19.683,41.402 ccw(c21.826,41.402) 20.311,39.887 ; R17.1@19.937,41.402 ccw(c22.693,41.402) 20.744,39.454 ; 60.515,37.275 cw(c59.671,36.432) 11.6@60.864,36.432 ; 60.948,36.842 cw(c60.539,36.432) 11.6@61.118,36.432
NetC3_2: C3.2 U1.49 | length 11
  Top Layer w0.254: U1.49@55.665,64.64 55.688,64.617 55.688,63.905 55.88,63.713 57.572,63.713 v1(57.658,63.627) ; 57.205,63.713 cw(c57.205,63.174) v1@57.586,63.555
  Bottom Layer w0.254: v1@57.658,63.525 cw(c57.658,63.28) 57.831,63.454 cw(c58.005,63.627) v1@57.76,63.627 ; v1(57.658,63.627) 59.248,62.037 59.248,61.53 60.643,60.135 61.381,60.135 62.334,59.182 v1(62.865,59.182)
NetC5_2: C5.2 U1.73 | length 8.5
  Top Layer w0.254: U1.73@57.915,77.39 v1@59.102,77.39 ; U1.73@58.437,77.39 ccw(c58.437,78.342) v1@59.11,77.669 ; 59.05,77.39 ccw(c59.05,77.729) v1@59.29,77.489
  Bottom Layer w0.254: v1@59.074,77.489 ccw(c59.314,77.729) 59.314,77.39 ; v1@59.102,77.39 60.501,77.39 C5.2@61.47,78.359 ; v1@59.254,77.669 ccw(c59.927,78.342) 59.927,77.39 ; 60.437,77.327 cw(c61.4,76.364) C5.2@61.451,77.724 ; 60.692,77.582 ccw(c60.042,78.232) C5.2@60.962,78.232 ; C5.2@60.849,77.738 cw(c61.429,77.158) C5.2@61.46,77.978
  other v1: 59.182,77.597
NetC16_1: C16.1 C17.2 SAFE.2 U3.3 | length 30.8
  Top Layer w1: C16.1@79.5,78.469 ccw(c79.5,79.044) C16.1@79.907,78.637 ; C16.1@79.692,78.74 80.01,78.74 81.351,80.081 ; 82.564,78.867 SAFE.2@84.519,78.867 ; SAFE.2@83.646,78.502 ccw(c82.765,77.621) 82.765,78.867 ccw(c82.765,80.113) SAFE.2@83.646,79.232
  Top Layer w2: U3.3@71.628,81.324 cw(c71.628,79.634) 72.823,80.829 ; U3.3@71.628,82.024 73.571,80.081 81.351,80.081 ; 76.777,80.081 cw(c76.777,76.078) C16.1@79.607,78.908 ; C16.1@79.715,78.796 cw(c81.351,78.397) 81.351,80.081 ; C16.1@79.806,78.932 cw(c81.134,77.119) 82.723,78.708 ; 82.074,79.357 ccw(c83.432,80.716) SAFE.2@84.006,78.882 ; 82.564,78.867 81.351,80.081
  other v1: 79.5,78.74
NetC22_1: C22.1 L1.1 U1.21 U1.22 | length 15.8
  Top Layer w0.254: C22.1@35.814,68.948 ccw(c36.405,68.982) C22.1@36.405,68.39 ; v1(35.941,68.963) 36.514,68.39 37.211,68.39 ; C22.1@36.068,68.963 ccw(c36.674,68.997) C22.1@36.674,68.39 ; C22.1@36.322,68.977 ccw(c36.942,69.012) 36.942,68.39 ; C22.1@36.575,68.991 ccw(c37.211,69.027) 37.211,68.39 ; U1.22@42.415,67.89 37.711,67.89 37.211,68.39 ; U1.21@42.415,68.39 37.211,68.39
NetDC_IN_1: DC_IN.1 K1.1 | length 16.2
  Top Layer w1: DC_IN.1@84.733,83.081 cw(c86.631,83.081) 85.289,84.423 ; DC_IN.1@85.733,83.081 cw(c90.045,83.081) 86.996,86.13
  Top Layer w2: DC_IN.1@83.947,83.081 87.734,86.868 K1.1@91.313,86.868 ; DC_IN.1@85.233,83.081 cw(c88.338,83.081) 86.142,85.276
NetDS2_2: DS2.2 R19.1 | length 6.4
  Top Layer w0.5: DS2.2@90.735,83.803 cw(c90.078,83.146) 91.007,83.146 cw(c91.937,83.146) DS2.2@91.279,83.803 ; R19.1@90.787,80.916 ccw(c90.255,81.448) 91.007,81.448 ; R19.1@90.932,80.643 91.007,80.719 DS2.2@91.007,84.076 ; 91.007,81.698 ccw(c92.114,81.698) R19.1@91.331,80.916
NetK2_3: K2.3 R4.2 R8.2 R12.2 R16.2 | length 39.5
  Top Layer w0.254: K2.3@33.401,51.054 36.801,54.454 R4.2@40.261,54.454 R8.2@44.579,54.454 R12.2@49.405,54.454 R16.2@54.231,54.454 ; K2.3@33.401,51.423 ccw(c33.401,52.314) 34.031,51.684 ccw(c34.661,51.054) K2.3@33.77,51.054 ; K2.3@33.401,51.677 ccw(c33.401,53.181) 34.465,52.118 ccw(c35.528,51.054) K2.3@34.024,51.054 ; R4.2@39.901,54.095 ccw(c39.034,53.228) 39.034,54.454 ccw(c39.034,55.681) R4.2@39.901,54.814 ; R4.2@40.62,54.095 cw(c41.487,53.228) 41.487,54.454 cw(c41.487,55.681) R4.2@40.62,54.814 ; R8.2@44.219,54.095 ccw(c43.352,53.228) 43.352,54.454 ccw(c43.352,55.681) R8.2@44.219,54.814 ; R8.2@44.938,54.095 cw(c45.805,53.228) 45.805,54.454 cw(c45.805,55.681) R8.2@44.938,54.814 ; R12.2@49.045,54.095 ccw(c48.178,53.228) 48.178,54.454 ccw(c48.178,55.681) R12.2@49.045,54.814 ; R12.2@49.764,54.095 cw(c50.631,53.228) 50.631,54.454 cw(c50.631,55.681) R12.2@49.764,54.814 ; R16.2@53.871,54.095 ccw(c53.004,53.228) 53.004,54.454 ccw(c53.004,55.681) R16.2@53.871,54.814
NetP1_1: P1.1 R1.2 U1.94 | length 28.2
  Top Layer w0.254: U1.94@47.165,80.14 47.165,82.217 v1@48.006,83.058 ; 47.715,82.767 ccw(c47.411,83.071) v1@47.841,83.071 ; v1@55.618,83.143 ccw(c55.444,83.316) 55.689,83.316 ccw(c55.935,83.316) v1@55.761,83.143 ; v1(55.689,83.071) 55.689,85.407 56.771,86.489 R1.2@56.771,86.614 56.898,86.741 P1.1@60.706,86.741 ; 55.901,85.619 cw(c56.771,84.749) R1.2@56.771,85.979 ; 55.905,85.623 ccw(c55.04,86.487) R1.2@56.263,86.487 ; R1.2@57.13,86.382 cw(c57.997,85.515) 57.997,86.741 cw(c57.997,87.967) R1.2@57.13,87.1 ; P1.1@60.265,86.3 ccw(c59.202,85.237) 59.202,86.741 ccw(c59.202,88.245) P1.1@60.265,87.182 ; P1.1@60.445,86.48 ccw(c59.815,85.85) 59.815,86.741 ccw(c59.815,87.632) P1.1@60.445,87.002
  Bottom Layer w0.254: v1(47.942,83.071) v1(55.689,83.071) v1@55.74,83.071 ; v1@48.014,82.999 cw(c48.188,82.826) 48.188,83.071 cw(c48.188,83.316) v1@48.014,83.143 ; v1@55.618,82.999 ccw(c55.444,82.826) 55.444,83.071 ccw(c55.444,83.316) v1@55.618,83.143
NetR21_2: R21.2 U1.37 | length 27.3
  Top Layer w0.254: U1.37@49.665,64.64 49.688,64.617 49.688,63.905 50.292,63.301 v1(50.292,62.992) ; 49.9,63.692 cw(c49.2,62.992) v1@50.19,62.992 ; 50.334,63.259 cw(c50.067,62.992) v1@50.444,62.992 ; v1(55.88,60.198) 55.88,60.325 v1(59.182,63.627) ; v1@55.982,60.198 cw(c56.533,60.198) 56.143,60.588 ; v1@59.08,63.627 cw(c58.835,63.627) 59.009,63.454 cw(c59.182,63.28) v1@59.182,63.525
  Bottom Layer w0.254: v1@50.292,62.89 cw(c50.292,62.645) 50.465,62.819 cw(c50.639,62.992) v1@50.394,62.992 ; v1(50.292,62.992) 52.124,61.16 53.03,61.16 53.992,60.198 v1(55.88,60.198) ; v1@55.808,60.126 ccw(c55.635,59.953) 55.635,60.198 ccw(c55.635,60.443) v1@55.808,60.27 ; v1(59.182,63.627) 62.357,66.802 R21.2@62.357,67.308 ; v1@59.182,63.729 ccw(c59.182,63.974) 59.355,63.8 ccw(c59.529,63.627) v1@59.284,63.627 ; 60.915,65.36 ccw(c58.966,67.308) R21.2@61.722,67.308 ; 61.349,65.794 ccw(c59.834,67.308) R21.2@61.976,67.308 ; 61.782,66.227 ccw(c60.701,67.308) R21.2@62.23,67.308 ; 62.216,66.661 ccw(c61.568,67.308) R21.2@62.484,67.308
NetR28_1: R28.1 R40.2 | length 20.1
  Top Layer w0.254: v1(6.604,21.209) 9.271,23.876 v1(10.668,23.876) ; v1@6.604,21.311 ccw(c6.604,21.556) 6.777,21.382 ccw(c6.951,21.209) v1@6.706,21.209 ; v1@10.596,23.804 ccw(c10.423,23.631) 10.423,23.876 ccw(c10.423,24.121) v1@10.596,23.948
  Bottom Layer w0.254: R28.1@3.327,14.808 6.604,18.085 v1(6.604,21.209) ; R28.1@3.327,15.306 ccw(c3.327,16.508) 4.178,15.658 ccw(c5.028,14.808) R28.1@3.825,14.808 ; v1@6.532,21.137 cw(c6.359,20.964) 6.604,20.964 cw(c6.849,20.964) v1@6.676,21.137 ; R40.2@9.652,25.275 10.668,24.259 v1(10.668,23.876) ; R40.2@9.779,24.767 cw(c9.779,23.847) 10.429,24.497 ; R40.2@10.032,25.249 ccw(c10.706,25.179) R40.2@10.227,24.7 ; R40.2@10.284,25.223 ccw(c11.391,25.109) 10.604,24.322
NetR29_1: R29.1 R41.2 | length 17.1
  Top Layer w0.254: v1(57.531,21.59) v1(59.436,23.495) ; v1@57.531,21.692 ccw(c57.531,21.937) 57.704,21.763 ccw(c57.878,21.59) v1@57.633,21.59 ; v1@59.334,23.495 cw(c59.089,23.495) 59.263,23.322 cw(c59.436,23.148) v1@59.436,23.393
  Bottom Layer w0.254: R29.1@54,15.179 ccw(c54,16.381) 54.851,15.531 ; R29.1@54.498,14.681 cw(c55.701,14.681) 54.851,15.531 ; v1@57.459,21.518 cw(c57.286,21.345) 57.531,21.345 cw(c57.776,21.345) v1@57.603,21.518 ; v1(57.531,21.59) 57.531,18.212 54.851,15.531 ; R41.2@58.547,25.402 59.436,24.513 v1(59.436,23.495) ; R41.2@58.674,24.894 cw(c58.674,23.974) 59.324,24.624 ; R41.2@59.169,25.287 ccw(c59.911,25.115) 59.372,24.576 ; v1@59.364,23.567 ccw(c59.191,23.74) 59.436,23.74 ccw(c59.681,23.74) v1@59.508,23.567
Netr60_2: r60.2 s0.2 | length 12.3
  Top Layer w0.254: s0.2@6.088,6.781 7.944,8.638 r60.2@10.922,8.638 ; 6.724,7.418 cw(c6.088,8.054) 6.088,7.154 ccw(c6.088,8.054) 6.724,7.418 ; 6.724,7.418 ccw(c7.361,6.781) 6.461,6.781 cw(c7.361,6.781) 6.724,7.418 ; 9.569,8.638 cw(c9.569,7.411) 10.436,8.278 ccw(c9.569,7.411) 9.569,8.638 ; 9.569,8.638 ccw(c9.569,9.864) 10.436,8.997 cw(c9.569,9.864) 9.569,8.638
Netr61_2: r61.2 s1.2 | length 12.5
  Bottom Layer w0.254: r61.2@13.208,8.638 16.406,8.638 s1.2@18.263,6.781 ; 14.561,8.638 cw(c14.561,9.864) 13.694,8.997 ccw(c14.561,9.864) 14.561,8.638 ; 14.561,8.638 ccw(c14.561,7.411) 13.694,8.278 cw(c14.561,7.411) 14.561,8.638 ; 17.626,7.418 cw(c16.989,6.781) 17.89,6.781 ccw(c16.989,6.781) 17.626,7.418 ; 17.626,7.418 ccw(c18.263,8.054) 18.263,7.154 cw(c18.263,8.054) 17.626,7.418
Netr62_2: r62.2 s2.2 | length 12.4
  Top Layer w0.254: r62.2@25.4,8.38 28.838,8.38 s2.2@30.438,6.781 ; 26.753,8.38 cw(c26.753,9.607) 25.886,8.74 ccw(c26.753,9.607) 26.753,8.38 ; 26.753,8.38 ccw(c26.753,7.154) 25.886,8.021 cw(c26.753,7.154) 26.753,8.38 ; 29.801,7.418 cw(c29.164,6.781) 30.065,6.781 ccw(c29.164,6.781) 29.801,7.418 ; 29.801,7.418 ccw(c30.438,8.054) 30.438,7.154 cw(c30.438,8.054) 29.801,7.418
Netr63_2: r63.2 s3.2 | length 12
  Top Layer w0.254: r63.2@37.846,7.999 41.394,7.999 s3.2@42.612,6.781 ; 39.199,7.999 cw(c39.199,9.226) 38.332,8.359 ccw(c39.199,9.226) 39.199,7.999 ; 39.199,7.999 ccw(c39.199,6.773) 38.332,7.64 cw(c39.199,6.773) 39.199,7.999 ; 41.976,7.418 cw(c41.339,6.781) 42.239,6.781 ccw(c41.339,6.781) 41.976,7.418 ; 41.976,7.418 ccw(c42.612,8.054) 42.612,7.154 cw(c42.612,8.054) 41.976,7.418
Netr64_2: r64.2 s4.2 | length 12.1
  Bottom Layer w0.254: s4.2@54.788,6.781 56.133,8.126 r64.2@59.69,8.126 ; 55.424,7.418 cw(c54.788,8.054) 54.788,7.154 ccw(c54.788,8.054) 55.424,7.418 ; 55.424,7.418 ccw(c56.061,6.781) 55.16,6.781 cw(c56.061,6.781) 55.424,7.418 ; 58.337,8.126 cw(c58.337,6.9) 59.204,7.767 ccw(c58.337,6.9) 58.337,8.126 ; 58.337,8.126 ccw(c58.337,9.353) 59.204,8.486 cw(c58.337,9.353) 58.337,8.126
Netr65_2: r65.2 s5.2 | length 12.2
  Top Layer w0.254: r65.2@61.976,8.126 65.617,8.126 s5.2@66.963,6.781 ; 63.329,8.126 cw(c63.329,9.353) 62.462,8.486 ccw(c63.329,9.353) 63.329,8.126 ; 63.329,8.126 ccw(c63.329,6.9) 62.462,7.767 cw(c63.329,6.9) 63.329,8.126 ; 66.326,7.418 cw(c65.689,6.781) 66.59,6.781 ccw(c65.689,6.781) 66.326,7.418 ; 66.326,7.418 ccw(c66.963,8.054) 66.963,7.154 cw(c66.963,8.054) 66.326,7.418
Netr66_2: r66.2 s6.2 | length 12.2
  Top Layer w0.254: r66.2@74.168,8.126 77.755,8.126 s6.2@79.1,6.781 ; 75.521,8.126 cw(c75.521,9.353) 74.654,8.486 ccw(c75.521,9.353) 75.521,8.126 ; 75.521,8.126 ccw(c75.521,6.9) 74.654,7.767 cw(c75.521,6.9) 75.521,8.126 ; 78.463,7.418 cw(c77.827,6.781) 78.727,6.781 ccw(c77.827,6.781) 78.463,7.418 ; 78.463,7.418 ccw(c79.1,8.054) 79.1,7.154 cw(c79.1,8.054) 78.463,7.418
Netr67_2: r67.2 s7.2 | length 11.7
  Top Layer w0.254: r67.2@86.868,8.126 89.967,8.126 s7.2@91.312,6.781 ; 88.221,8.126 cw(c88.221,9.353) 87.354,8.486 ccw(c88.221,9.353) 88.221,8.126 ; 88.221,8.126 ccw(c88.221,6.9) 87.354,7.767 cw(c88.221,6.9) 88.221,8.126 ; 90.676,7.418 cw(c90.039,6.781) 90.94,6.781 ccw(c90.039,6.781) 90.676,7.418 ; 90.676,7.418 ccw(c91.312,8.054) 91.312,7.154 cw(c91.312,8.054) 90.676,7.418
NetR70_2: R70.2 R80.1 | length 22.7
  Bottom Layer w0.254: R80.1@15.037,16.154 17.629,16.154 R70.2@25.4,8.384 ; 16.239,16.154 cw(c16.239,17.357) 15.389,16.507 ccw(c16.239,17.357) 16.239,16.154 ; 16.239,16.154 ccw(c16.239,14.952) 15.389,15.802 cw(c16.239,14.952) 16.239,16.154 ; 24.316,9.468 cw(c23.232,8.384) 24.765,8.384 ccw(c23.232,8.384) 24.316,9.468 ; 24.623,9.161 ccw(c25.273,9.811) 25.273,8.892 cw(c25.273,9.811) 24.623,9.161 ; 24.75,9.034 cw(c24.099,8.384) 25.019,8.384 ccw(c24.099,8.384) 24.75,9.034
NetR71_2: R71.2 R81.1 | length 22
  Bottom Layer w0.254: R71.2@25.4,2.669 25.4,6.524 26.489,7.613 26.489,9.346 25.451,10.384 R81.1@25.451,16.154 ; 25.4,3.895 cw(c24.174,3.895) 25.041,3.028 ccw(c24.174,3.895) 25.4,3.895 ; 25.4,3.895 ccw(c26.626,3.895) 25.759,3.028 cw(c26.626,3.895) 25.4,3.895 ; 25.451,14.952 cw(c26.653,14.952) 25.803,15.802 ccw(c26.653,14.952) 25.451,14.952 ; 25.451,14.952 ccw(c24.249,14.952) 25.099,15.802 cw(c24.249,14.952) 25.451,14.952
NetR72_2: R72.2 R82.1 | length 16.7
  Bottom Layer w0.254: R82.1@35.738,16.154 37.846,14.046 R72.2@37.846,8.003 ; 36.588,15.304 cw(c37.438,16.154) 36.236,16.154 ccw(c37.438,16.154) 36.588,15.304 ; 36.588,15.304 ccw(c35.738,14.454) 35.738,15.656 cw(c35.738,14.454) 36.588,15.304 ; 37.846,9.229 cw(c36.62,9.229) 37.487,8.362 ccw(c36.62,9.229) 37.846,9.229 ; 37.846,9.229 ccw(c39.072,9.229) 38.205,8.362 cw(c39.072,9.229) 37.846,9.229
NetR73_2: R73.2 R83.1 | length 26
  Bottom Layer w0.254: R73.2@37.846,2.794 40.64,5.588 40.64,10.77 R83.1@46.152,16.281 ; 45.302,15.431 cw(c46.152,14.581) 46.152,15.783 ccw(c46.152,14.581) 45.302,15.431 ; 45.302,15.431 ccw(c44.452,16.281) 45.654,16.281 cw(c44.452,16.281) 45.302,15.431 ; R73.2@37.973,3.302 ccw(c37.973,4.222) 38.623,3.571 cw(c37.973,4.222) R73.2@37.973,3.302 ; R73.2@38.227,2.794 cw(c39.147,2.794) 38.496,3.444 ccw(c39.147,2.794) R73.2@38.227,2.794 ; R73.2@38.481,2.794 cw(c40.014,2.794) 38.93,3.878 ccw(c40.014,2.794) R73.2@38.481,2.794
NetR74_2: R74.2 R84.1 | length 25.8
  Bottom Layer w0.254: R84.1@64.313,15.519 64.313,13.785 67.914,10.183 67.914,8.921 R74.2@74.041,2.794 ; 64.313,14.317 cw(c65.515,14.317) 64.665,15.167 ccw(c65.515,14.317) 64.313,14.317 ; 64.313,14.317 ccw(c63.111,14.317) 63.961,15.167 cw(c63.111,14.317) 64.313,14.317 ; 72.957,3.878 cw(c71.873,2.794) 73.406,2.794 ccw(c71.873,2.794) 72.957,3.878 ; 73.264,3.571 ccw(c73.914,4.222) 73.914,3.302 cw(c73.914,4.222) 73.264,3.571 ; 73.391,3.444 cw(c72.74,2.794) 73.66,2.794 ccw(c72.74,2.794) 73.391,3.444
NetR75_2: R75.2 R85.1 | length 16.2
  Bottom Layer w0.254: R75.2@72.009,8.126 72.009,13.056 R85.1@74.6,15.646 ; 72.009,9.353 cw(c70.783,9.353) 71.65,8.486 ccw(c70.783,9.353) 72.009,9.353 ; 72.009,9.353 ccw(c73.235,9.353) 72.368,8.486 cw(c73.235,9.353) 72.009,9.353 ; 73.75,14.796 cw(c74.6,13.946) 74.6,15.148 ccw(c74.6,13.946) 73.75,14.796 ; 73.75,14.796 ccw(c72.9,15.646) 74.102,15.646 cw(c72.9,15.646) 73.75,14.796
NetR76_2: R76.2 R86.1 | length 17.1
  Bottom Layer w0.254: R86.1@85.014,15.519 85.779,14.754 85.779,7.359 86.487,6.651 R76.2@86.487,2.924 ; 86.487,4.151 cw(c85.261,4.151) 86.128,3.283 ccw(c85.261,4.151) 86.487,4.151 ; 86.487,4.151 ccw(c87.713,4.151) 86.846,3.283 cw(c87.713,4.151) 86.487,4.151
NetR77_2: R77.2 R87.1 | length 16.7
  Bottom Layer w0.254: R77.2@86.868,8.13 94.385,15.646 R87.1@95.174,15.646 ; R77.2@86.995,8.638 ccw(c86.995,9.557) 87.645,8.907 cw(c86.995,9.557) R77.2@86.995,8.638 ; R77.2@87.249,8.13 cw(c88.169,8.13) 87.518,8.78 ccw(c88.169,8.13) R77.2@87.249,8.13 ; R77.2@87.503,8.13 cw(c89.036,8.13) 87.952,9.214 ccw(c89.036,8.13) R77.2@87.503,8.13
NREST: C9.1 R3.1 RESET.2 U1.14 | length 58.2
  Top Layer w0.254: RESET.2@13.103,68.98 cw(c11.377,67.254) 13.818,67.254 ; RESET.2@13.103,71.228 ccw(c11.377,72.954) 13.818,72.954 ; C9.1@13.216,66.68 ccw(c11.764,68.131) 13.818,68.131 ; RESET.2@13.282,69.159 cw(c11.99,67.867) 13.818,67.867 ; RESET.2@13.282,71.049 ccw(c11.99,72.341) 13.818,72.341 ; C9.1@13.396,66.5 ccw(c12.377,67.518) 13.818,67.518 ; RESET.2@13.41,70.62 ccw(c13.592,71.488) 14.219,70.861 ; R3.1@13.458,73.299 cw(c12.591,72.432) 13.818,72.432 cw(c15.044,72.432) R3.1@14.177,73.299 ; RESET.2@13.462,69.339 cw(c12.604,68.481) 13.818,68.481 ; RESET.2@13.462,70.104 RESET.2@13.818,70.46 ; RESET.2@13.514,71.118 ccw(c13.823,72.585) 14.883,71.525 ; RESET.2@13.566,71.366 ccw(c13.938,73.133) 15.214,71.856 ; C9.1@13.665,65.977 13.818,66.129 RESET.2@13.818,70.46 ; 13.818,67.396 ccw(c14.83,67.396) C9.1@14.114,66.68 ; 13.818,71.727 cw(c12.604,71.727) 13.462,70.869 ccw(c13.707,72.037) 14.551,71.193 ; R3.1@13.818,73.658 RESET.2@13.818,70.46 ; U1.14@42.415,71.89 33.282,71.89 31.623,70.231 29.544,70.231 29.533,70.242 26.782,70.242 26.771,70.231 25.146,71.856 15.214,71.856 ; RESET.2@13.818,70.46 15.214,71.856
NRST: NOKIA1.4 U1.45 | length 55.8
  Top Layer w0.254: NOKIA1.4@10.795,58.051 cw(c10.795,56.547) 11.859,57.61 cw(c12.922,58.674) NOKIA1.4@11.418,58.674 ; NOKIA1.4@10.795,58.305 cw(c10.795,57.414) 11.425,58.044 cw(c12.055,58.674) NOKIA1.4@11.164,58.674 ; NOKIA1.4@10.795,58.674 13.589,55.88 28.702,55.88 35.179,62.357 42.069,62.357 42.037,62.325 42.037,61.976 42.738,61.275 43.499,61.275 44.48,60.294 44.516,60.294 44.516,59.752 45.147,59.121 49.088,59.121 50.279,60.312 50.279,61.074 51.238,61.074 53.642,63.478 53.642,64.617 U1.45@53.665,64.64
OSC_IN: 8.2 C7.1 U1.12 | length 24.5
  Top Layer w0.254: 8.2@28.575,76.508 cw(c28.575,75.282) 29.442,76.149 cw(c30.309,77.016) 8.2@29.083,77.016 ; 8.2@28.575,77.016 30.788,74.803 34.161,74.803 C7.1@35.941,76.583 35.941,75.332 37.03,74.243 37.03,73.841 37.981,72.89 U1.12@42.415,72.89 ; 34.857,75.499 ccw(c33.773,76.583) C7.1@35.306,76.583 ; 35.164,75.805 cw(c35.814,75.155) C7.1@35.814,76.075 ; 35.291,75.932 ccw(c34.64,76.583) C7.1@35.56,76.583 ; C7.1@35.582,76.223 cw(c34.715,75.356) 35.941,75.356 cw(c37.167,75.356) C7.1@36.3,76.223
OSC_OUT: 8.1 C8.1 U1.13 | length 21.6
  Top Layer w0.254: 8.1@28.575,72.136 30.734,74.295 34.927,74.295 C8.1@35.941,73.281 36.832,72.39 U1.13@42.415,72.39 ; 8.1@28.575,72.644 ccw(c28.575,73.87) 29.442,73.003 ccw(c30.309,72.136) 8.1@29.083,72.136 ; 34.863,74.358 cw(c33.794,73.289) C8.1@35.306,73.283 ; 35.164,74.058 ccw(c35.814,74.708) C8.1@35.814,73.789 ; 35.294,73.927 cw(c34.652,73.286) C8.1@35.56,73.282 ; C8.1@36.068,72.773 cw(c36.068,71.853) 36.718,72.503 ; C8.1@36.563,73.167 ccw(c37.31,72.995) 36.768,72.454
OUT1: 7.4 zhuzi1.1 | length 144.2
  Top Layer w1: zhuzi1.1@15.131,31.826 ccw(c14.383,32.614) 15.469,32.614 ; zhuzi1.1@15.469,31.961 ccw(c15.469,33.786) 16.759,32.496 ; zhuzi1.1@15.807,31.826 cw(c16.555,32.614) 15.469,32.614 ; 21.618,37.112 cw(c29.464,29.266) 29.464,40.362 ccw(c29.464,31.719) 23.353,37.831 ; 21.645,36.123 cw(c29.464,28.305) 7.4@29.464,39.362 ; 23.178,37.656 ccw(c17.528,43.307) 25.519,43.307 cw(c19.981,43.307) 23.897,39.391 ; 23.325,38.819 cw(c29.464,32.68) 29.464,41.362 ccw(c29.464,35.133) 7.4@25.06,39.538 ; 24.262,38.74 ccw(c19.696,43.307) 26.154,43.307 cw(c22.149,43.307) 24.981,40.475 ; 24.886,39.364 ccw(c20.942,43.307) 26.519,43.307 cw(c23.395,43.307) 7.4@25.604,41.098 ; 7.4@25.032,40.526 cw(c29.464,36.095) 7.4@29.464,42.362 ; 7.4@25.97,40.448 ccw(c23.11,43.307) 7.4@27.154,43.307 ; 7.4@26.107,42.388 ccw(c27.007,43.4) 7.4@27.964,42.442 ; 7.4@26.771,43.135 ccw(c27.712,44.194) 7.4@28.714,43.192 ; 7.4@27.436,43.882 ccw(c28.418,44.988) 7.4@29.464,43.942 ; 7.4@27.481,39.897 cw(c25.476,36.449) v5(29.464,36.449) ; 7.4@27.576,42.898 cw(c29.464,41.714) 7.4@29.464,43.942 ; 7.4@27.677,42.155 ccw(c26.524,43.307) 7.4@28.154,43.307 ; 7.4@27.984,40.761 cw(c26.487,38.188) 29.464,38.188 cw(c32.441,38.188) 7.4@30.944,40.761 ; 7.4@31.447,39.897 ccw(c33.452,36.449) v5(29.464,36.449) ; 15.469,32.614 zhuzi1.1@15.469,31.471 15.469,31.205 19.696,35.433 20.955,35.433 7.4@29.464,43.942 ; 15.469,32.614 19.05,36.195 20.701,36.195 28.448,43.942 7.4@29.464,43.942 ; v5(29.464,36.449) 7.4@29.464,43.942
OUT2: 9.4 zhuzi1.2 | length 70
  Top Layer w0.8: 34.417,29.337 35.687,30.607 35.687,38.227
  Top Layer w1: zhuzi1.2@20.469,30.98 cw(c20.469,29.796) 21.306,30.633 cw(c22.144,31.471) zhuzi1.2@20.959,31.471 ; zhuzi1.2@20.469,31.471 22.602,29.337 34.417,29.337 ; 35.687,38.227 9.4@41.402,43.942 ; 36.64,39.18 ccw(c33.069,42.75) 9.4@38.096,43.233 ; 9.4@38.045,42.388 ccw(c38.945,43.4) 9.4@39.902,42.442 ; 9.4@38.139,40.679 ccw(c35.805,43.013) 9.4@39.091,43.329 ; 9.4@38.709,43.135 ccw(c39.65,44.194) 9.4@40.652,43.192 ; 9.4@39.374,43.882 ccw(c40.356,44.988) 9.4@41.402,43.942 ; 9.4@39.532,39.833 cw(c37.847,36.703) v5(41.402,36.703) ; 9.4@39.639,42.179 ccw(c38.542,43.276) 9.4@40.086,43.425 ; 9.4@40.006,40.714 cw(c38.748,38.377) 41.402,38.377 cw(c44.056,38.377) 9.4@42.798,40.714 ; 9.4@43.272,39.833 ccw(c44.957,36.703) v5(41.402,36.703) ; v5(41.402,36.703) 9.4@41.402,43.942
OUT3: 10.4 zhuzi2.1 | length 64.4
  Top Layer w1: 10.4@50.581,39.833 cw(c48.896,36.703) v5(52.451,36.703) ; 10.4@51.055,40.714 cw(c49.797,38.377) 52.451,38.377 cw(c55.105,38.377) 10.4@53.847,40.714 ; 10.4@54.321,39.833 ccw(c56.006,36.703) v5(52.451,36.703) ; 10.4@54.634,43.307 ccw(c58.371,43.307) 10.4@55.729,40.664 ; 10.4@55.634,43.307 ccw(c61.785,43.307) 57.436,38.957 ; zhuzi2.1@75.176,31.598 cw(c73.992,31.598) 74.829,30.76 cw(c75.667,29.923) zhuzi2.1@75.667,31.107 ; zhuzi2.1@75.667,31.598 73.152,29.083 60.96,29.083 58.42,31.623 58.42,37.973 10.4@52.451,43.942 v5(52.451,36.703)
OUT4: 11.4 zhuzi2.2 | length 118.3
  Top Layer w1: 11.4@61.757,39.833 cw(c60.072,36.703) v5(63.627,36.703) ; 11.4@62.231,40.714 cw(c60.973,38.377) 63.627,38.377 cw(c66.281,38.377) 11.4@65.023,40.714 ; 11.4@63.627,39.362 cw(c63.627,24.932) 73.83,35.136 ; 11.4@63.627,40.362 cw(c63.627,28.346) 72.123,36.843 ; 11.4@63.627,41.362 cw(c63.627,31.761) 70.416,38.55 ; 11.4@63.627,42.362 cw(c63.627,35.175) 68.709,40.257 ; 11.4@65.37,42.927 ccw(c63.627,41.938) 11.4@63.627,43.942 ; 11.4@65.497,39.833 ccw(c67.182,36.703) v5(63.627,36.703) ; 11.4@65.81,43.307 ccw(c69.547,43.307) 11.4@66.905,40.664 ; 11.4@67.572,43.307 ccw(c72.19,43.307) 68.925,40.041 ; 11.4@67.624,41.342 cw(c69.589,43.307) 66.81,43.307 ccw(c72.961,43.307) 68.612,38.957 ; zhuzi2.2@80.176,31.598 ccw(c78.992,31.598) 79.829,32.435 ccw(c80.667,33.273) zhuzi2.2@80.667,32.088 ; zhuzi2.2@80.32,31.251 ccw(c79.482,30.413) 79.482,31.598 ccw(c79.482,32.782) zhuzi2.2@80.32,31.945 ; v5(63.627,36.703) 11.4@63.627,43.942 ; 11.4@63.627,43.942 65.024,43.942 73.66,35.306 76.958,35.306 zhuzi2.2@80.667,31.598 79.146,31.598 75.946,34.798 72.771,34.798 11.4@63.627,43.942
PA3: U1.26
PA12: U1.71
PA15: U1.77
PB3: U1.89
PB4: U1.90
PB5: U1.91
PB10: extra.2 U1.47 | length 44.4
  Top Layer w0.254: U1.47@54.665,64.64 54.665,57.737 53.546,56.618 53.546,56.158 54.161,55.543 55.001,55.543 55.971,54.573 67.735,54.573 70.24,52.068 70.24,49.903 72.071,48.072 72.963,48.072 73.594,48.703 73.594,50.537 74.807,51.75 76.577,51.75 77.654,50.673 extra.2@78.232,50.673 ; 76.866,51.461 ccw(c77.586,52.18) extra.2@77.986,51.246 ; 77.131,51.196 ccw(c77.745,51.809) extra.2@78.087,51.012 ; 77.397,50.931 ccw(c77.904,51.438) extra.2@78.187,50.779
PB11: U1.48
PC4: U1.33 | length 0
  Top Layer w0.254: U1.33@47.642,64.617 U1.33@47.665,64.64
PC5: U1.34
PC8: chu.2 U1.65 | length 27.7
  Top Layer w0.254: U1.65@57.915,73.39 60.698,73.39 60.73,73.358 61.547,73.358 v1(61.595,73.406) ; 61.235,73.358 ccw(c61.235,73.766) v1@61.523,73.478 ; v1@63.428,86.288 cw(c63.255,86.115) 63.5,86.115 cw(c63.745,86.115) v1@63.572,86.288 ; 63.5,82.631 ccw(c63.962,82.631) v1@63.635,82.304 ; v1(63.5,86.36) 63.5,82.296 v1@63.627,82.169
  Bottom Layer w0.254: chu.2@61.058,91.774 cw(c60.824,91.313) 61.341,91.313 ; chu.2@61.341,92.329 61.341,91.313 ; v1(61.595,73.406) 61.976,73.406 63.563,74.993 v1(63.563,82.233) ; chu.2@61.624,91.774 ccw(c61.858,91.313) 61.341,91.313 ; v1@63.428,86.432 ccw(c63.255,86.605) 63.5,86.605 ccw(c63.745,86.605) v1@63.572,86.432 ; v1@63.492,82.161 cw(c63.318,81.987) 63.563,81.987 cw(c63.809,81.987) v1@63.635,82.161 ; v1(63.5,86.36) 63.5,89.154 61.341,91.313